# Allegro board ADS1115_DAC8552.brd
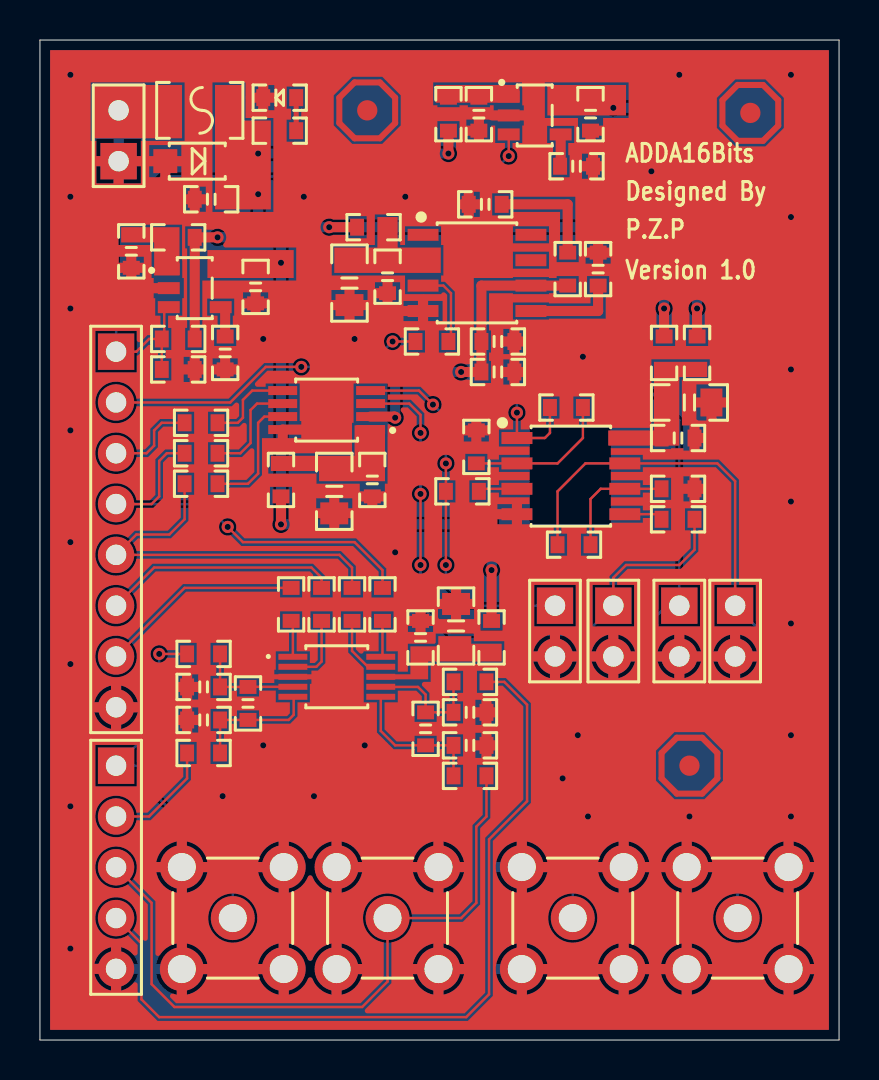
[diagram p0: board, top side]
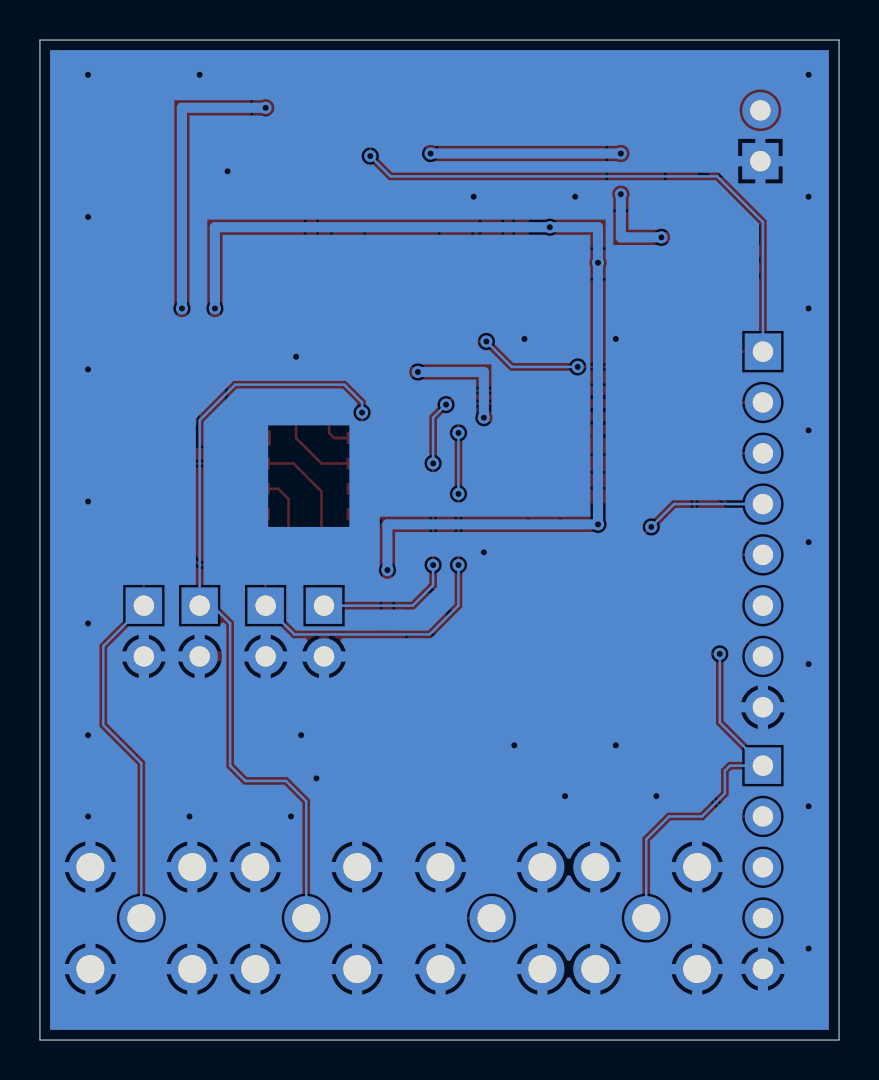
[diagram p1: board, bottom side, seen from below]

Outline 40 x 50 mm; copper layers: TOP, BOTTOM. Coordinates in mm from the lower left corner of the outline.
Outline path: 0,50 0,0 40,0 40,50 0,50

## Design rules (mm)
net group POWER: nets 4V5 10V GND VCC_IN

## Placement (name value [footprint] x y rotation side)
C1  10uF  [C0603]  4.57 40.26 270 top
C2  4.7uF  [C0603]  27.56 47.12 270 top
C3  10uF  [C0603]  10.79 38.48 270 top
C4  1uF  [C0603]  21.97 47.12 270 top
C5  22uF  [C0603]  9.4 42.04 180 top
C6  NC  [C0603]  9.27 33.53 90 top
C7  10nF  [C0603]  27.69 43.69 180 top
C8  100nF  [C0603]  31.11 30.1 0 top
C9  10uF  [C0805]  32.51 31.88 0 top
C10  10uF  [C0805]  14.73 27.43 270 top
C11  100nF  [C0603]  16.64 28.83 270 top
C12  10uF  [C0805]  15.49 37.85 90 top
C13  1uF  [C0603]  17.4 37.34 90 top
C14  1uF  [C0603]  27.94 39.37 270 top
C15  10uF  [C0603]  23.75 33.4 180 top
C16  100nF  [C0603]  23.75 34.92 180 top
C17  47uF  [C0603]  21.46 41.78 0 top
C18  22nF  [C0603]  7.37 17.65 0 top
C19  100nF  [C0603]  19.05 20.95 270 top
C20  10uF  [C0805]  20.83 20.7 270 top
C21  220nF  [C0603]  10.41 17.65 270 top
C22  22nF  [C0603]  20.7 16.38 0 top
C23  22nF  [C0603]  9.02 16 180 top
C24  220nF  [C0603]  19.3 14.73 90 top
C25  22nF  [C0603]  22.35 14.73 180 top
D1  BZT52C5V1  [BZT52CX_SOD_123]  7.87 43.94 0 top
F1  FUSE  [FUSE1210]  9.53 46.48 180 top
J1  POWER  [HEADER1X2_2R54]  3.94 43.94 90 top
J2  DAC_A  [HEADER1X2_2R54]  25.78 21.72 270 top
J3  OUT_A  [HEADER1X2_2R54]  32 21.72 270 top
J4  ADC_AIN  [HEADER1X5_2R54]  3.81 13.72 270 top
J5  DAC_B  [HEADER1X2_2R54]  28.7 21.72 270 top
J6  OUT_B  [HEADER1X2_2R54]  34.8 21.72 270 top
J7  CTRL  [HEADER1X8_2R54]  3.81 34.42 270 top
LED1  LED  [LED0603]  12.83 47.12 180 top
NOREF  -  [unnamed]  16.38 46.48 0 top
NOREF#2  -  [#2]  40 0 90 top
NOREF#3  -  [unnamed]  35.56 46.35 0 top
NOREF#4  -  [unnamed]  32.51 13.72 0 top
NOREF#5  -  [#2]  0 0 0 top
P1  SMA  [SMA_WI]  26.67 6.1 0 top
P2  SMA  [SMA_WI]  9.65 6.1 0 top
P3  SMA  [SMA_WI]  34.92 6.1 0 top
P4  SMA  [SMA_WI]  17.4 6.1 0 top
R1  0R  [R0603]  7.75 40.13 180 top
R2  4.7K  [R0603]  11.18 45.47 0 top
R3  0R  [R0603]  20.45 45.47 90 top
R4  10K  [R0603]  7.75 35.05 180 top
R5  NC  [R0603]  7.75 33.53 180 top
R6  NC  [R0603]  32.89 33.53 90 top
R7  0R  [R0603]  31.24 33.53 90 top
R8  0R  [R0603]  17.53 40.64 180 top
R9  0R  [R0603]  12.06 28.83 270 top
R10  0R  [R0603]  27.18 31.62 180 top
R11  100R  [R0603]  8.89 27.81 180 top
R12  NC  [R0603]  21.84 30.48 270 top
R13  4.7K  [R0603]  20.32 27.43 0 top
R14  0R  [R0603]  27.56 24.77 180 top
R15  100R  [R0603]  8.89 29.34 180 top
R16  1K  [R0603]  18.8 34.92 0 top
R17  NC  [R0603]  31.11 27.56 0 top
R18  1R  [R0603]  26.42 39.37 270 top
R19  4.7K  [R0603]  31.11 26.04 0 top
R20  100R  [R0603]  8.89 30.86 180 top
R21  100R  [R0603]  17.14 20.95 90 top
R22  RES  [R0603]  12.57 22.61 270 top
R23  100R  [R0603]  15.62 20.95 90 top
R24  RES  [R0603]  14.1 22.61 270 top
R25  0R  [R0603]  22.61 19.3 90 top
R26  100R  [R0603]  7.37 19.3 0 top
R27  100R  [R0603]  7.37 14.35 0 top
R28  100R  [R0603]  22.35 17.91 180 top
R29  100R  [R0603]  22.35 13.21 180 top
U1  TLV702_45  [TLV702_45_SOT_23]  7.75 37.59 0 top
U2  LP2985_10  [LP2985_SOT_23]  24.77 46.23 0 top
U3  REF5040  [REF5040_SOIC_8]  19.18 40.26 0 top
U4  DAC8552  [DAC8552_VSSOP_8_0R65]  14.35 31.5 90 top
U5  OPA2376  [OPA2376_SOIC_8]  23.88 30.1 0 top
U6  ADS1115  [ADS1115_VSSOP_10_0R50]  14.86 18.16 0 top

## Library data of the parts
C1-C25 = CAP
D1 = DIODE_ZENER
F1 = FUSE
J1-J3 J5 J6 = HEADER 2
J4 = HEADER 5
J7 = HEADER 8
LED1 = LED
P1-P4 = SMA
R1-R29 = RES
U1 = TLV702
U2 = LP2985
U3 = REF50xx
U4 = DAC8552
U5 = OPAx376
U6 = ADS111x

## Footprints (pads in the part's own frame, mm; a bottom-side part is the same pattern mirrored in y, then rotated)
ADS1115_VSSOP_10_0R50
  rect 1.45x0.3 smd: 1(-2.2,1) 2(-2.2,0.5) 3(-2.2,0) 4(-2.2,-0.5) 5(-2.2,-1) 6(2.2,-1) 7(2.2,-0.5) 8(2.2,0) 9(2.2,0.5) 10(2.2,1)
BZT52CX_SOD_123
  rect 1.2x1.2 smd: 1(-1.6,0) 2(1.6,0)
C0603
  rect 0.7x0.85 smd: 1(0,0) 2(1.65,0)
C0805
  rect 1.1x1.4 smd: 1(-1.1,0) 2(1.1,0)
DAC8552_VSSOP_8_0R65
  rect 0.45x1.45 smd: 1(-0.975,-2.2) 2(-0.325,-2.2) 3(0.325,-2.2) 4(0.975,-2.2) 5(0.975,2.2) 6(0.325,2.2) 7(-0.325,2.2) 8(-0.975,2.2)
FUSE1210
  rect 1x2.5 smd: 1(0,0) 2(3,0)
HEADER1X2_2R54
  rect 1.82x1.82 hole 1.02: 1(0,0)
  round 1.82 hole 1.02: 2(2.54,0)
HEADER1X5_2R54
  rect 1.82x1.82 hole 1.02: 1(0,0)
  round 1.82 hole 1.02: 2(2.54,0) 3(5.08,0) 4(7.62,0) 5(10.16,0)
HEADER1X8_2R54
  rect 1.82x1.82 hole 1.02: 1(0,0)
  round 1.82 hole 1.02: 2(2.54,0) 3(5.08,0) 4(7.62,0) 5(10.16,0) 6(12.7,0) 7(15.24,0) 8(17.78,0)
LED0603
  rect 0.7x0.85 smd: 1(0,0) 2(1.65,0)
LP2985_SOT_23
  rect 1.1x0.6 smd: 1(-1.3,0.95) 2(-1.3,0) 3(-1.3,-0.95) 4(1.3,-0.95) 5(1.3,0.95)
OPA2376_SOIC_8
  rect 1.55x0.6 smd: 1(0,0) 2(0,-1.27) 3(0,-2.54) 4(0,-3.81) 5(5.4,-3.81) 6(5.4,-2.54) 7(5.4,-1.27) 8(5.4,0)
R0603
  rect 0.7x0.85 smd: 1(0,0) 2(1.65,0)
REF5040_SOIC_8
  rect 1.55x0.6 smd: 1(0,0) 2(0,-1.27) 3(0,-2.54) 4(0,-3.81) 5(5.4,-3.81) 6(5.4,-2.54) 7(5.4,-1.27) 8(5.4,0)
SMA_WI
  round 2.2 hole 1.4: 1(-2.55,2.55) 2(-2.55,-2.55) 3(2.55,2.55) 4(2.55,-2.55) 5(0,0)
TLV702_45_SOT_23
  rect 1.1x0.6 smd: 1(-1.3,0.95) 2(-1.3,0) 3(-1.3,-0.95) 4(1.3,-0.95) 5(1.3,0.95)
unnamed
  round 1.016 smd: 1(0,0)

## Nets
4V5: C3.1 R7.2 R8.2 R9.2 R25.2 U1.5(OUT)
10V: C2.1 R6.2 U2.5(OUT)
GND: C1.2 C2.2 C3.2 C4.2 C5.2 C6.1 C7.1 C8.2 C9.2 C10.2 C11.2 C12.1 C13.1 C14.1 C15.1 C16.1 C17.1 C18.1 C19.1 C20.1 C22.2 C23.2 C25.1 D1.1(ANODE) J1.1 J2.2 J3.2 J4.5 J5.2 J6.2 J7.8 LED1.2(CATHODE) P1.1 P1.2 P1.3 P1.4 P2.1 P2.2 P2.3 P2.4 P3.1 P3.2 P3.3 P3.4 P4.1 P4.2 P4.3 P4.4 R5.1 R12.1 R17.2 U1.2(GND) U2.2(GND) U3.4(GND) U4.8(GND) U5.4(V-) U6.3(GND)
VCC_IN: C5.1 D1.2(CATHODE) F1.1 R1.1 R2.1 R3.1 R4.1
AD_RDY: J7.6 R24.1
AIN0: J4.1 P2.5 R26.1
AIN1: J4.2 R27.1
AIN2: J4.3 P4.5 R29.1
AIN3: J4.4 R28.1
CS_ADC: J7.7 R22.1
CS_DAC: J7.3 R20.2
DAC_A: J2.1 R13.1 U4.4(VOUTA)
DAC_B: J5.1 R19.2 U4.3(VOUTB)
EN: J7.1 R4.2 R5.2 U1.3(EN) U2.3(ON/O\F\F\)
OUT_A: J3.1 P1.5 R10.2 U5.1(OUTA)
OUT_B: J6.1 P3.5 R14.2 U5.7(OUTB)
SCLK: J7.4 R15.2 R21.2
SDAT: J7.5 R11.2 R23.2
TEMP: J7.2 R16.1
N00653: F1.2 J1.2
N02377: LED1.1(ANODE) R2.2
N03172: C1.1 R1.2 U1.1(IN)
N04557: C4.1 R3.2 U2.1(IN)
N05236: C7.2 U2.4(BYPASS)
N06084: C14.2 U3.5(TRIM/NR)
N06097: C15.2 C16.2 R18.2 U3.6(VOUT) U4.2(VREF)
N06106: C12.2 C13.2 R8.1 U3.2(VIN)
N06821: R16.2 U3.3(TEMP)
N07129: C17.2 R18.1
N08485: R11.1 U4.7(DIN)
N08516: R20.1 U4.5(S\Y\N\C\)
N08531: R15.1 U4.6(SCLK)
N09040: C10.1 C11.1 R9.1 U4.1(VDD)
N11892: C18.2 C21.1 R26.2 U6.4(AIN0)
N11905: C21.2 C23.1 R27.2 U6.5(AIN1)
N13305: R21.1 U6.10(SCL)
N13332: R23.1 U6.9(SDA)
N13706: C24.1 C25.2 R29.2 U6.6(AIN2)
N13710: C22.1 C24.2 R28.2 U6.7(AIN3)
N15107: C19.2 C20.2 R25.1 U6.8(VDD)
N16080: R22.2 U6.1(ADDR)
N16092: R24.2 U6.2(ALERT/RDY)
N17878: C6.2 U1.4(NC)
N19342: R10.1 R12.2 U5.2(-INA)
N19483: C8.1 C9.1 R6.1 R7.1 U5.8(V+)
N20068: R19.1 U5.5(+INB)
N20085: R13.2 U5.3(+INA)
N20461: R14.1 R17.1 U5.6(-INB)

Pads without a net: NOREF 1; NOREF#3 1; NOREF#4 1; U3 1 7 8

## Via types
v1: diameter 0.61, hole 0.305, TOP to BOTTOM, 56 vias

## Routing (per net, layer and track width the routed paths; a pad name or vN(x,y) marks a point on that pad's centre or on a via; arc(x,y) is an arc through that point)
4V5: length 57.7
  TOP w0.508: R9.2 v1(12.06,25.78) ; R7.2 v1(31.24,36.58) ; v1(22.61,23.5) R25.2 ; v1(14.48,40.64) R8.2
  BOTTOM w0.508: v1(22.61,23.5) 22.61,25.78 v1(12.06,25.78) v1(12.06,38.86) 12.06,40.64 v1(14.48,40.64) 31.24,40.64 v1(31.24,36.58)
10V: length 15.6
  TOP w0.508: v1(32.89,36.58) R6.2
  BOTTOM w0.508: v1(28.7,46.61) 32.89,46.61 v1(32.89,36.58)
GND: length 301.8
  TOP w0.508: 8.58,33.53 C6.1 ; C6.1 9.96,33.53 ; C6.1 9.27,34.14 ; C6.1 9.27,32.91 ; C10.2 15.7,26.33 ; C10.2 13.77,26.33 ; C10.2 14.73,27.15 ; C10.2 14.73,25.52 ; C1.2 5.26,38.61 ; C1.2 4.57,39.23 ; C1.2 3.88,38.61 ; C1.2 4.57,37.99 ; 20.85,41.78 C17.1 ; C17.1 21.46,42.47 ; C17.1 22.08,41.78 ; C17.1 21.46,41.09 ; 3.94,42.77 J1.1 ; J1.1 2.76,43.94 ; J1.1 5.11,43.94 ; R12.1 21.84,31.1 ; R12.1 21.15,30.48 ; R12.1 22.54,30.48 ; R12.1 21.84,29.86 ; C18.1 7.98,17.65 ; C18.1 6.75,17.65 ; C18.1 7.37,16.96 ; C18.1 7.37,18.34 ; 2.63,16.64 J7.8 ; J7.8 4.99,16.64 ; J7.8 3.81,17.81 ; J7.8 3.81,15.46 ; C20.1 20.83,22.62 ; C20.1 19.86,21.8 ; C20.1 21.79,21.8 ; C20.1 20.83,20.98 ; J6.2 35.97,19.18 ; J6.2 34.8,20.35 ; J6.2 33.62,19.18 ; J6.2 34.8,18 ; U3.4 19.18,37.02 ; U3.4 19.18,35.88 ; U3.4 18.14,36.45 ; 32.38,7.28 P3.1 ; P3.1 33.74,8.65 ; P3.1 32.38,10.01 ; P3.1 31.01,8.65 ; 30.83,19.18 J3.2 ; J3.2 33.18,19.18 ; J3.2 32,20.35 ; J3.2 32,18 ; LED1.2 11.79,47.12 ; LED1.2 10.56,47.12 ; LED1.2 11.18,46.43 ; LED1.2 11.18,47.81 ; C15.1 23.75,34.09 ; C15.1 24.37,33.4 ; C15.1 23.13,33.4 ; C15.1 23.75,32.71 ; 36.11,8.65 P3.3 ; P3.3 38.84,8.65 ; P3.3 37.47,7.28 ; P3.3 37.47,10.01 ; C7.1 27.69,44.38 ; C7.1 27.07,43.69 ; C7.1 28.3,43.69 ; C7.1 27.69,43 ; P4.2 14.85,4.91 ; P4.2 16.22,3.55 ; P4.2 14.85,2.18 ; C19.1 19.05,21.57 ; C19.1 19.74,20.95 ; C19.1 18.36,20.95 ; C19.1 19.05,20.34 ; R5.1 7.75,34.22 ; R5.1 7.75,32.84 ; R5.1 7.13,33.53 ; R5.1 8.36,33.53 ; C16.1 23.75,35.62 ; C16.1 23.75,34.23 ; C16.1 24.37,34.92 ; C16.1 23.13,34.92 ; P1.2 25.49,3.55 ; P1.2 24.12,4.91 ; P1.2 24.12,2.18 ; 14.53,36.75 C12.1 ; C12.1 16.46,36.75 ; C12.1 15.49,37.56 ; C12.1 15.49,35.93 ; C25.1 22.35,15.42 ; C25.1 22.97,14.73 ; C25.1 22.35,14.04 ; C25.1 21.74,14.73 ; P2.1 7.1,10.01 ; P2.1 8.47,8.65 ; P2.1 5.74,8.65 ; P2.1 7.1,7.28 ; U1.2 5.33,37.59 ; 32.77,29.41 C8.2 ; C8.2 33.38,30.1 ; C8.2 32.77,30.79 ; 18.58,8.65 P4.3 ; P4.3 19.95,7.28 ; P4.3 21.32,8.65 ; P4.3 19.95,10.01 ; 12.2,2.18 P2.4 ; P2.4 12.2,4.91 ; P2.4 10.84,3.55 ; P3.4 38.84,3.55 ; P3.4 37.47,2.18 ; P3.4 37.47,4.91 ; P3.4 36.11,3.55 ; P1.1 25.49,8.65 ; P1.1 24.12,10.01 ; P1.1 24.12,7.28 ; P2.2 7.1,4.91 ; P2.2 7.1,2.18 ; P2.2 8.47,3.55 ; 28.25,45.47 C2.2 27.56,44.85 ; 10.84,8.65 P2.3 ; P2.3 12.2,10.01 ; P2.3 12.2,7.28 ; C22.2 22.97,16.38 ; C22.2 22.35,15.69 ; C22.2 22.35,17.07 ; C22.2 21.73,16.38 ; J2.2 25.78,20.35 ; J2.2 26.96,19.18 ; J2.2 25.78,18 ; J2.2 24.6,19.18 ; C23.2 7.98,16 ; C23.2 7.37,15.31 ; C23.2 6.75,16 ; C23.2 7.37,16.69 ; C11.2 17.33,27.18 ; C11.2 15.95,27.18 ; C11.2 16.64,26.56 ; 28.7,18 J5.2 ; J5.2 27.53,19.18 ; J5.2 28.7,20.35 ; J5.2 29.88,19.18 ; C3.2 10.79,37.45 ; C3.2 10.79,36.21 ; C3.2 11.49,36.83 ; C3.2 10.1,36.83 ; 12.15,30.03 U4.8 13.14,30.52 ; 32.77,26.87 R17.2 ; R17.2 32.77,28.25 ; R17.2 33.38,27.56 ; R17.2 32.15,27.56 ; 17.4,36.72 C13.1 ; C13.1 16.71,37.34 ; C13.1 17.4,37.95 ; 32.38,2.18 P3.2 ; P3.2 33.74,3.55 ; P3.2 32.38,4.91 ; P3.2 31.01,3.55 ; C14.1 27.94,39.99 ; C14.1 28.63,39.37 ; C14.1 27.94,38.75 ; C14.1 27.25,39.37 ; 21.97,44.85 C4.2 ; C4.2 21.28,45.47 ; C4.2 21.97,46.08 ; D1.1 7.14,43.94 ; D1.1 5.41,43.94 ; D1.1 6.27,43.08 ; P4.4 19.95,4.91 ; P4.4 19.95,2.18 ; P4.4 18.58,3.55 ; P4.4 21.32,3.55 ; P1.4 29.22,4.91 ; P1.4 29.22,2.18 ; P1.4 27.85,3.55 ; P1.4 30.59,3.55 ; 2.63,3.56 J4.5 ; J4.5 3.81,2.38 ; J4.5 3.81,4.73 ; P4.1 16.22,8.65 ; P4.1 14.85,10.01 ; P4.1 14.85,7.28 ; 22.83,26.29 U5.4 ; U5.4 23.88,26.86 ; U5.4 23.88,25.72 ; C9.2 34.43,31.88 ; C9.2 33.61,30.91 ; C9.2 32.8,31.88 ; 27.85,8.65 P1.3 ; P1.3 29.22,10.01 ; P1.3 30.59,8.65 ; P1.3 29.22,7.28 ; C5.2 8.36,42.04 ; C5.2 7.75,41.35 ; C5.2 7.75,42.73 ; C5.2 7.13,42.04 ; 22.65,46.23 U2.2 24.28,46.23
  BOTTOM w0.508: 19.95,2.18 P4.4 ; P4.4 19.95,4.91 ; P4.4 21.32,3.55 ; P4.4 18.58,3.55 ; 37.47,2.18 P3.4 ; P3.4 36.11,3.55 ; P3.4 38.84,3.55 ; P3.4 37.47,4.91 ; J5.2 28.7,20.35 ; J5.2 27.53,19.18 ; J5.2 28.7,18 ; J5.2 29.88,19.18 ; 27.85,3.55 P1.4 ; P1.4 29.22,2.18 ; P1.4 29.22,4.91 ; P1.4 30.59,3.55 ; J1.1 3.94,45.12 ; J1.1 2.76,43.94 ; J1.1 5.11,43.94 ; J1.1 3.94,42.77 ; J2.2 26.96,19.18 ; J2.2 24.6,19.18 ; J2.2 25.78,18 ; P3.2 33.74,3.55 ; P3.2 32.38,2.18 ; P3.2 32.38,4.91 ; P3.2 31.01,3.55 ; J7.8 4.99,16.64 ; J7.8 3.81,17.81 ; J7.8 2.63,16.64 ; J7.8 3.81,15.46 ; 27.85,8.65 P1.3 ; P1.3 29.22,10.01 ; P1.3 29.22,7.28 ; P1.3 30.59,8.65 ; 31.01,8.65 P3.1 ; P3.1 32.38,7.28 ; P3.1 33.74,8.65 ; P3.1 32.38,10.01 ; 34.8,18 J6.2 ; J6.2 35.97,19.18 ; J6.2 33.62,19.18 ; J6.2 34.8,20.35 ; 14.85,7.28 P4.1 ; P4.1 16.22,8.65 ; P4.1 14.85,10.01 ; P1.1 24.12,10.01 ; P1.1 24.12,7.28 ; P1.1 25.49,8.65 ; P1.1 22.75,8.65 ; J3.2 32,20.35 ; J3.2 33.18,19.18 ; J3.2 32,18 ; 7.1,2.18 P2.2 ; P2.2 5.74,3.55 ; P2.2 8.47,3.55 ; P2.2 7.1,4.91 ; 10.84,3.55 P2.4 ; P2.4 12.2,2.18 ; P2.4 12.2,4.91 ; 22.75,3.55 P1.2 ; P1.2 24.12,2.18 ; P1.2 24.12,4.91 ; P1.2 25.49,3.55 ; 36.11,8.65 P3.3 ; P3.3 37.47,10.01 ; P3.3 38.84,8.65 ; P3.3 37.47,7.28 ; 14.85,2.18 P4.2 ; P4.2 16.22,3.55 ; P4.2 14.85,4.91 ; P2.1 8.47,8.65 ; P2.1 5.74,8.65 ; P2.1 7.1,7.28 ; P2.1 7.1,10.01 ; 2.63,3.56 J4.5 ; J4.5 4.99,3.56 ; J4.5 3.81,2.38 ; J4.5 3.81,4.73 ; 12.2,7.28 P2.3 ; P2.3 12.2,10.01 ; P2.3 10.84,8.65 ; P4.3 21.32,8.65 ; P4.3 18.58,8.65 ; P4.3 19.95,7.28 ; P4.3 19.95,10.01
  vias: v1(1.52,48.26) v1(1.52,42.16) v1(1.52,36.58) v1(1.52,30.48) v1(1.52,24.89) v1(1.52,18.8) v1(1.52,11.68) v1(1.52,4.57) v1(9.14,12.19) v1(11.18,35.05) v1(11.18,14.73) v1(13.21,42.16) v1(13.72,12.19) v1(15.75,35.05) v1(16.26,14.73) v1(17.78,24.38) v1(18.29,42.16) v1(26.16,13.08) v1(26.92,15.24) v1(27.18,34.16) v1(27.43,11.18) v1(30.61,43.43) v1(32,48.26) v1(32.51,11.18) v1(37.59,48.26) v1(37.59,41.15) v1(37.59,33.53) v1(37.59,26.92) v1(37.59,20.83) v1(37.59,15.24) v1(37.59,11.18)
VCC_IN: length 21.1
  TOP w0.508: R4.1 R1.1 v1(8.89,40.13) ; v1(20.45,44.32) R3.1
  BOTTOM w0.508: v1(10.92,44.32) v1(20.45,44.32) ; v1(8.89,40.13) 10.92,40.13 v1(10.92,42.29)
AD_RDY: length 11.8
  TOP w0.127: R24.1 14.1,23.11 13.59,23.62 5.71,23.62 3.81,21.72
AIN0: length 19.9
  TOP w0.127: R26.1 v1(5.97,19.3)
  BOTTOM w0.127: P2.5 9.65,10.03 8.51,11.18 6.86,11.18 5.71,12.32 5.71,13.46 5.46,13.72 J4.1 5.97,15.88 v1(5.97,19.3)
AIN1: length 5.6
  TOP w0.127: J4.2 5.46,11.18 7.37,13.08 R27.1
AIN2: length 33.9
  TOP w0.127: R29.1 22.35,11.18 21.84,10.67 21.84,6.86 21.08,6.1 P4.5 17.4,2.92 16.13,1.65 6.73,1.65 5.59,2.79 5.59,6.86 J4.3
AIN3: length 40.6
  TOP w0.127: J4.4 5.08,4.83 5.08,2.03 5.97,1.14 21.34,1.14 22.48,2.29 22.48,10.03 24.38,11.94 24.38,16.76 23.24,17.91 R28.1
CS_ADC: length 10.2
  TOP w0.127: R22.1 7.24,22.61 J7.7
CS_DAC: length 4.5
  TOP w0.127: R20.2 6.1,30.86 5.71,30.48 5.71,29.72 5.33,29.34 3.81,29.34
DAC_A: length 18.6
  TOP w0.127: v1(20.32,28.83) R13.1 v1(20.32,23.75) ; U4.4 18.97,32.47 v1(19.67,31.77)
  BOTTOM w0.127: v1(19.67,31.77) 20.32,31.12 v1(20.32,28.83) ; v1(20.32,23.75) 20.32,22.73 21.34,21.72 J2.1
DAC_B: length 30.7
  TOP w0.127: v1(19.05,30.35) 19.05,31.26 18.49,31.82 U4.3 ; J5.1 28.7,23.11 29.34,23.75 32,23.75 32.77,24.51 R19.2 ; v1(19.05,27.3) v1(19.05,23.75)
  BOTTOM w0.127: J5.1 27.26,20.28 20.49,20.28 19.05,21.72 v1(19.05,23.75) ; v1(19.05,27.3) v1(19.05,30.35)
EN: length 34.4
  TOP w0.127: R4.2 5.46,35.05 4.83,34.42 J7.1 ; R4.2 6.22,35.18 6.22,36.45 6.42,36.64 U1.3 ; R4.2 R5.2 ; U2.3 v1(23.47,44.2)
  BOTTOM w0.127: J7.1 3.81,40.89 6.1,43.18 22.45,43.18 v1(23.47,44.2)
OUT_A: length 42.7
  TOP w0.127: R10.2 25.53,30.35 25.27,30.1 U5.1 v1(23.88,31.37)
  BOTTOM w0.127: v1(23.88,31.37) 23.88,31.88 24.77,32.77 30.23,32.77 32,30.99 J3.1 31.37,21.72 30.48,20.83 30.48,13.72 29.72,12.95 27.69,12.95 26.67,11.94 P1.5
OUT_B: length 36
  TOP w0.127: J6.1 34.8,27.94 33.91,28.83 U5.7 27.3,28.83 25.91,27.43 R14.2
  BOTTOM w0.127: P3.5 34.92,13.84 36.83,15.75 36.83,19.68 J6.1
SCLK: length 21.1
  TOP w0.127: J7.4 5.59,26.8 5.97,27.18 5.97,28.96 6.35,29.34 R15.2 ; R21.2 17.14,23.5 15.75,24.89 10.16,24.89 v1(9.4,25.65)
  BOTTOM w0.127: v1(9.4,25.65) 8.26,26.8 J7.4
SDAT: length 19
  TOP w0.127: 3.94,24.38 4.83,25.27 6.48,25.27 7.24,26.04 R11.2 ; 3.94,24.38 J7.5 ; 3.94,24.38 4.06,24.26 14.99,24.26 15.62,23.62 R23.2
TEMP: length 16.2
  TOP w0.127: R16.1 v1(17.65,34.92) ; 3.81,31.88 9.53,31.88 11.3,33.66 v1(13.08,33.66)
  BOTTOM w0.127: v1(17.65,34.92) 16.38,33.66 v1(13.08,33.66)
N02377: length 1.7
  TOP w0.254: R2.2 12.83,47.12 LED1.1
N05236: length 1.6
  TOP w0.508: U2.4 26.06,43.72 C7.2
N06084: length 4.6
  TOP w0.508: C14.2 27.94,36.45 U3.5
N06097: length 16.5
  TOP w0.508: v1(21.08,33.4) C15.2 C16.2 22.1,37.72 U3.6 R18.2 ; v1(17.78,31.11) 17.72,31.17 U4.2
  BOTTOM w0.508: v1(21.08,33.4) 17.78,33.4 v1(17.78,31.11)
N06821: length 4
  TOP w0.127: R16.2 20.57,35.05 20.57,37.34 20.19,37.72 U3.3
N07129: length 5.7
  TOP w0.508: R18.1 26.42,41.78 C17.2
N08485: length 6.1
  TOP w0.127: R11.1 10.41,27.81 10.92,28.32 10.92,30.86 11.23,31.17 U4.7
N08516: length 4.4
  TOP w0.127: U4.5 10.63,32.47 10.16,32 10.16,31.11 9.91,30.86 R20.1
N08531: length 5.3
  TOP w0.127: U4.6 10.87,31.82 10.54,31.5 10.54,29.84 10.03,29.34 R15.1
N11892: length 5.3
  TOP w0.127: U6.4 10.42,17.66 C21.1 C18.2 R26.2
N11905: length 6.4
  TOP w0.127: R27.2 C23.1 9.02,16 C21.2 12.45,16 12.7,16.26 12.7,17.12 U6.5
N13305: length 1.8
  TOP w0.127: U6.10 17.14,19.25 R21.1
N13332: length 3.3
  TOP w0.127: U6.9 16.41,18.66 15.62,19.45 R23.1
N13706: length 7.2
  TOP w0.127: R29.2 C25.2 C24.1 17.78,14.73 17.06,15.45 U6.6
N13710: length 6.2
  TOP w0.127: R28.2 20.7,17.91 C22.1 19.3,16.38 C24.2 19.3,17.27 18.92,17.65 17.07,17.65 U6.7
N16080: length 1.8
  TOP w0.127: U6.1 12.66,20.87 R22.2
N16092: length 3.6
  TOP w0.127: R24.2 14.1,18.92 13.83,18.66 U6.2
N17878: length 1.7
  TOP w0.508: C6.2 9.27,36.64 U1.4
N19342: length 7.4
  TOP w0.127: R12.2 21.84,28.83 U5.2 25.91,28.83 27.18,30.1 R10.1
N20068: length 1.9
  TOP w0.127: R19.1 30.86,26.29 U5.5
N20085: length 2
  TOP w0.127: U5.3 22.1,27.56 R13.2
N20461: length 6.1
  TOP w0.127: R14.1 27.56,27.05 28.07,27.56 U5.6 R17.1

## Copper pours and planes (outline as drawn; the poured copper is in the pictures)
4V5 on TOP (solid shape): 12.7,38.1 8.38,38.1 8.38,39.5 12.7,39.5
10V on TOP (solid shape): 29.34,46.23 25.4,46.23 25.4,47.75 29.34,47.75
GND on TOP (solid shape): outline of 4685 points within 0.51,0.51 39.49,49.49
GND on BOTTOM (solid shape): outline of 3852 points within 0.51,0.51 39.49,49.49
VCC_IN on TOP (solid shape): 10.16,45.97 11.56,45.97 11.56,41.53 8.76,41.53 8.76,47.75 10.16,47.75
N00653 on TOP (solid shape): 7.11,45.09 2.67,45.09 2.67,47.75 7.11,47.75
N03172 on TOP (solid shape): 6.99,38.23 5.71,38.23 5.71,39.88 4.06,39.88 4.06,40.64 6.99,40.64
N04557 on TOP (solid shape): 24,46.86 19.81,46.86 19.81,47.75 24,47.75
N06106 on TOP (solid shape): 17.91,39.62 20.07,39.62 20.07,38.35 14.73,38.35 14.73,39.62 16.89,39.62 16.89,41.15 17.91,41.15
N09040 on TOP (solid shape): 17.27,27.94 13.97,27.94 13.97,28.45 11.56,28.45 11.56,29.21 15.75,29.21 15.75,30.73 17.27,30.73
N15107 on TOP (solid shape): 21.59,19.81 23.11,19.81 23.11,18.92 19.43,18.92 19.43,18.03 16.38,18.03 16.38,18.29 18.54,18.29 18.54,19.68 19.81,19.68 19.94,19.81 19.94,20.19 21.59,20.19
N19483 on TOP (solid shape): 33.4,33.15 32,33.15 32,29.72 28.45,29.72 28.45,30.48 30.73,30.48 30.73,33.91 33.4,33.91

## Text on the board
Ref Des/Silkscreen Top: ADDA16Bits | Designed By | P.Z.P | Version 1.0
NCLEGEND-1-2: FIGURE | SIZE | 12.0 | 40.161 | 55.118 | DRILL CHART: TOP to BOTTOM | ALL UNITS ARE IN MILS | PLATED | QTY | 56 | 16 | 7 | 20
